# Altium PCB SCC.PcbDoc
Units mm, origin at the board's own origin, x right, y up, seen from the top; angles counter-clockwise.
Board outline 99.06 x 71.12 mm, 4 copper layers (Top Layer, Int1 (GND), Int2 (PWR), Bottom Layer), stack 1.369 mm thick; 7 components, 5 nets, 55 pads, 36 vias.
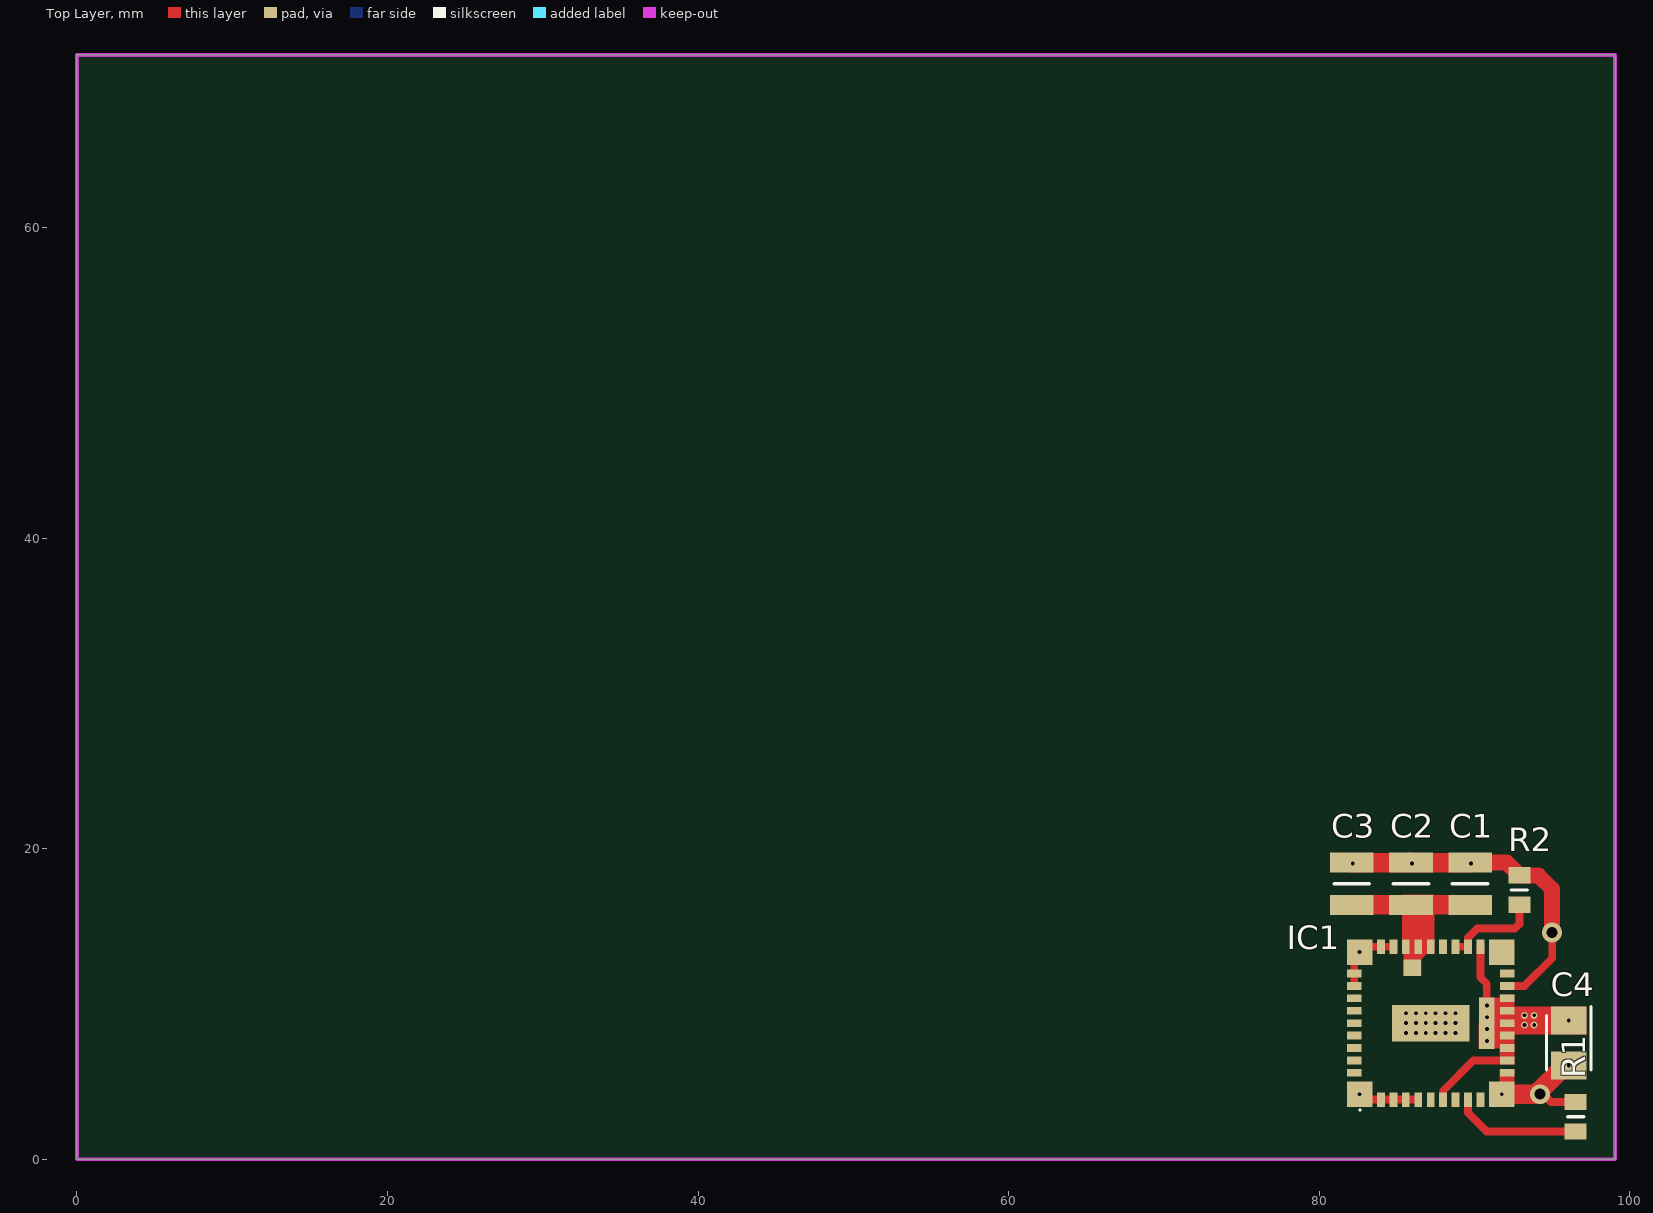
[diagram p0: Top Layer view]
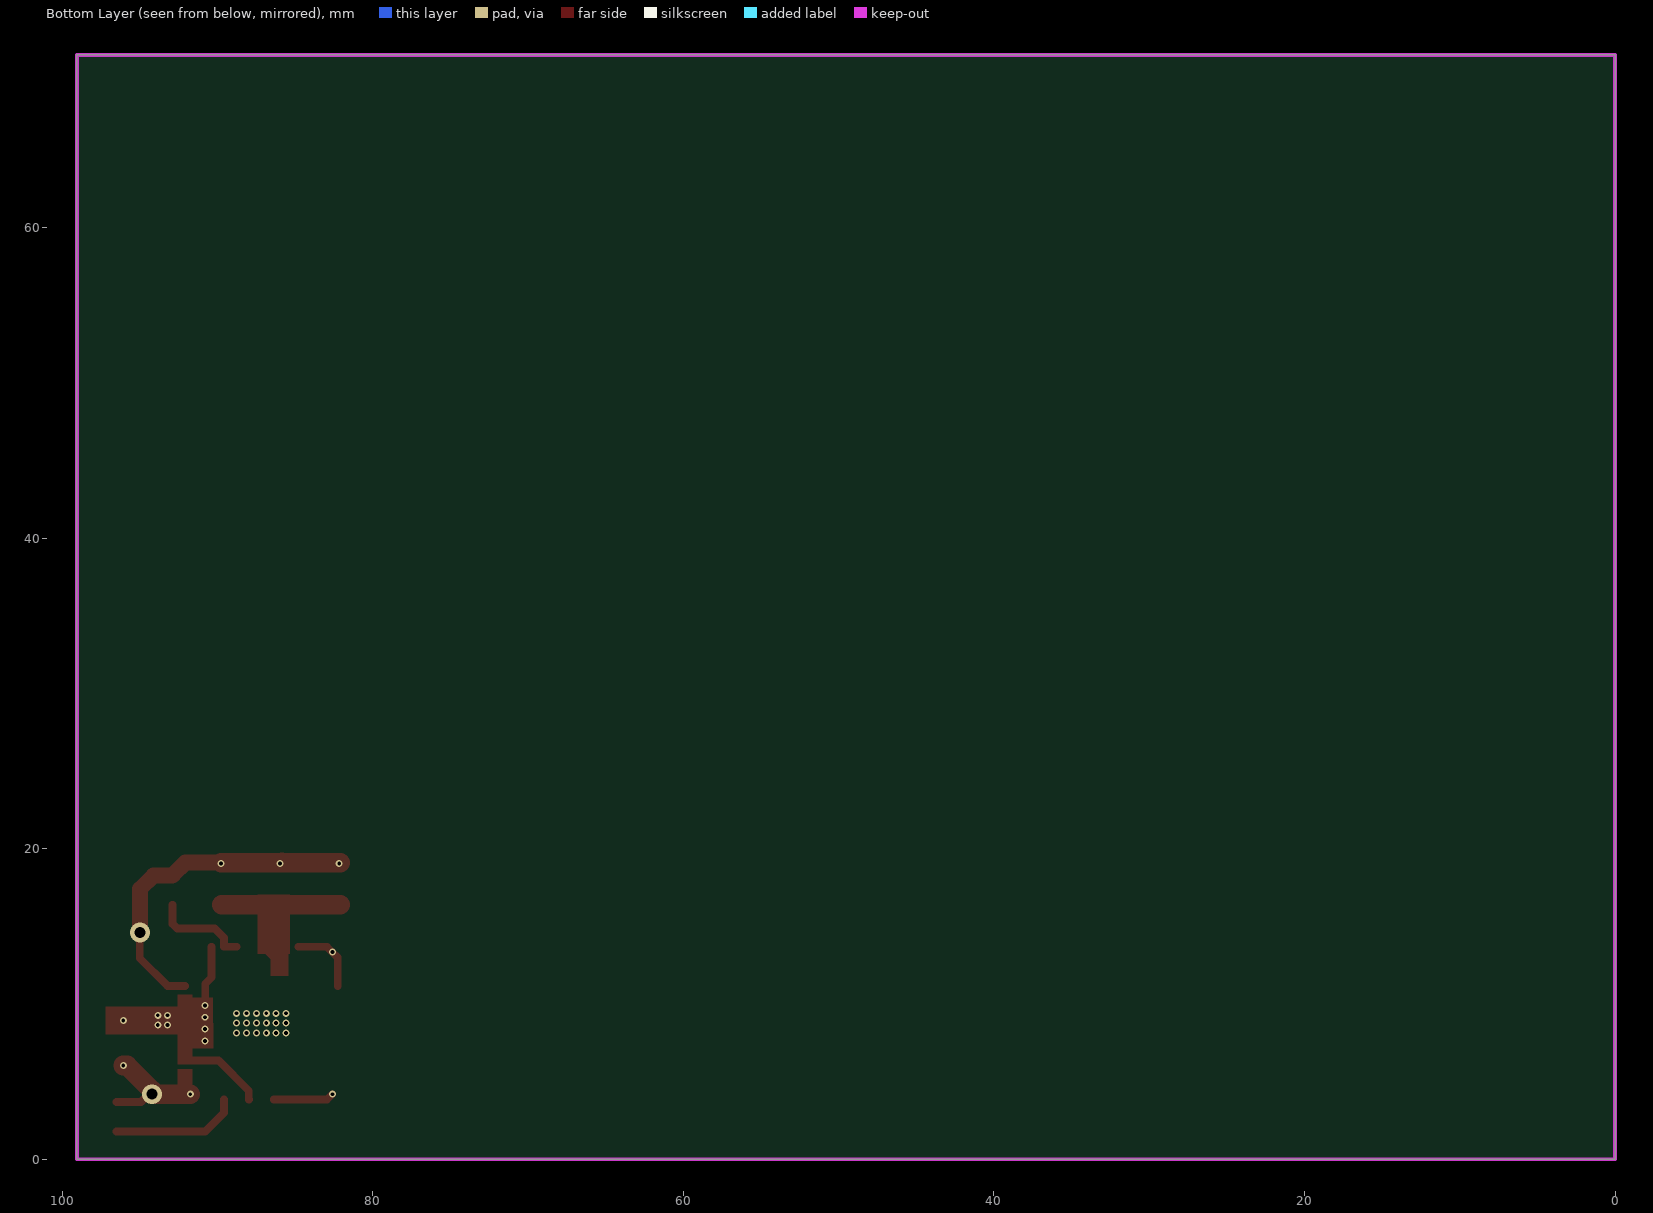
[diagram p1: Bottom Layer view, seen from below]
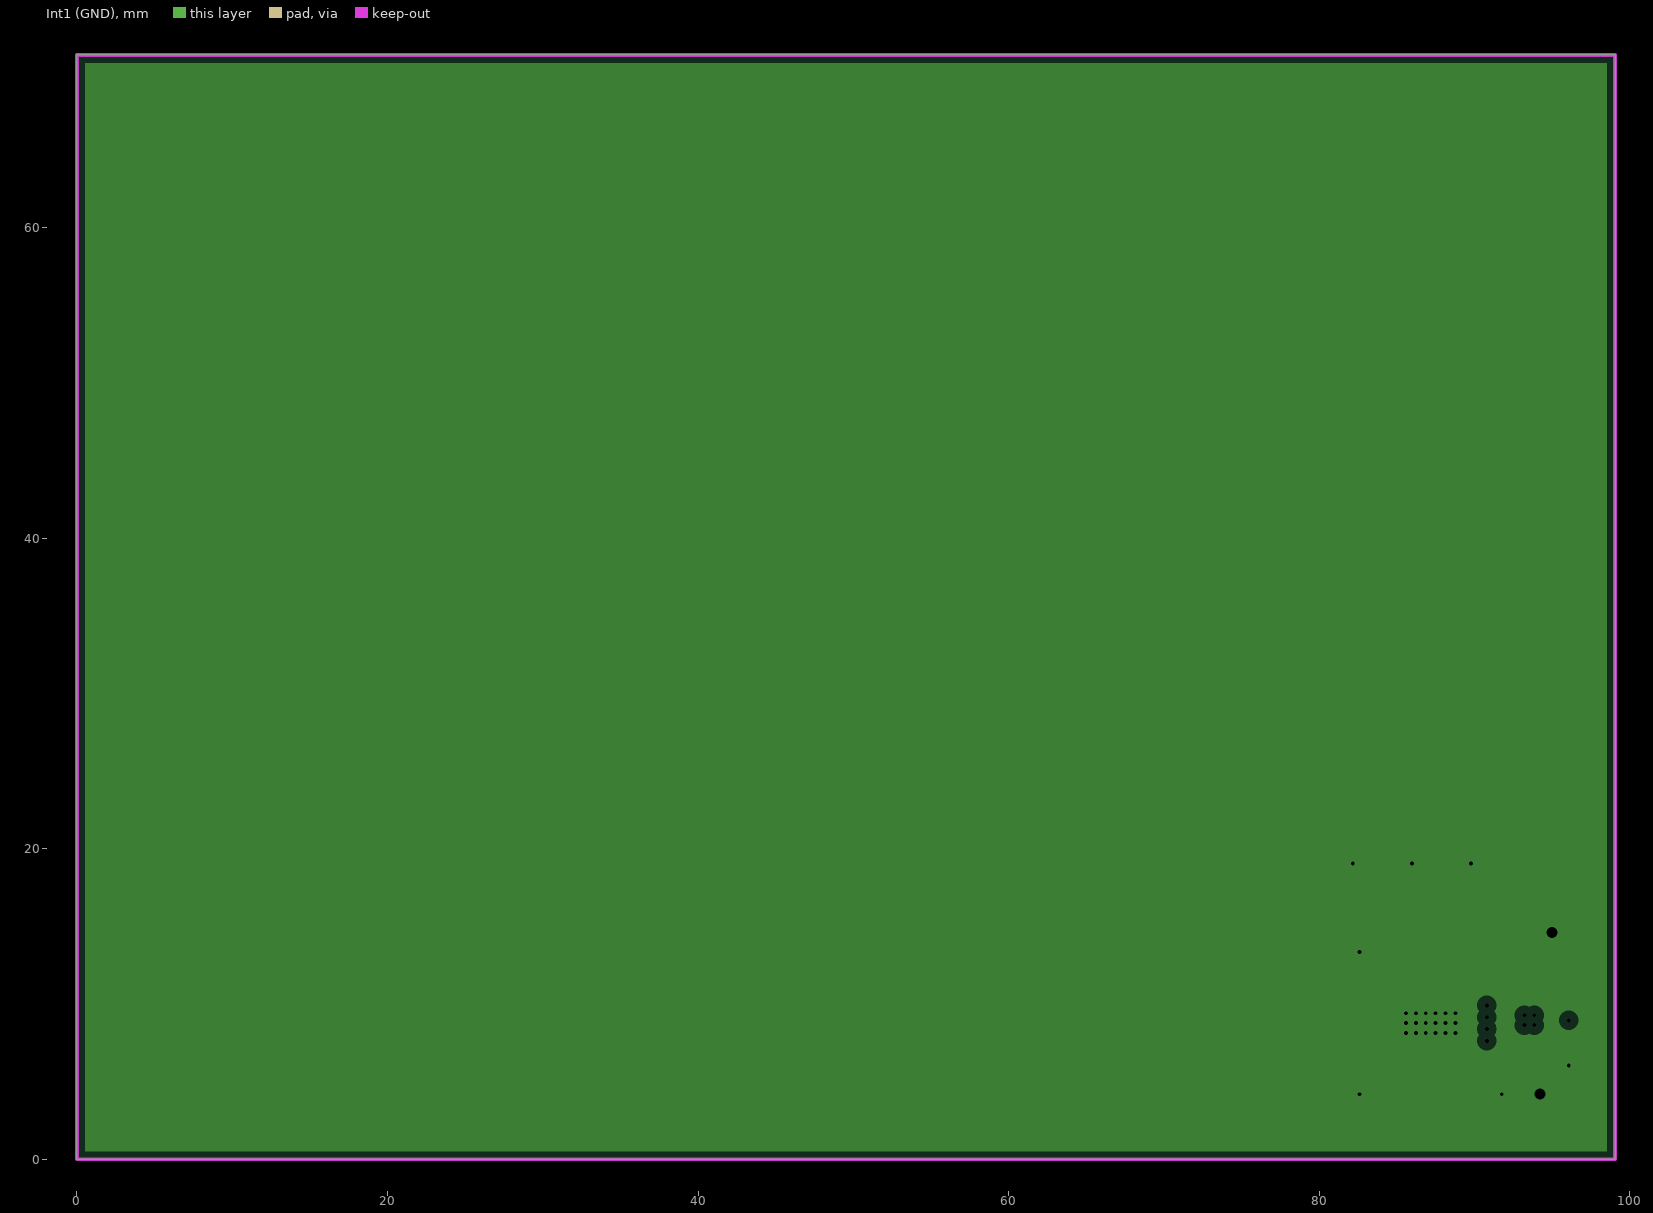
[diagram p2: Int1 (GND), clearances drawn from the general rule]
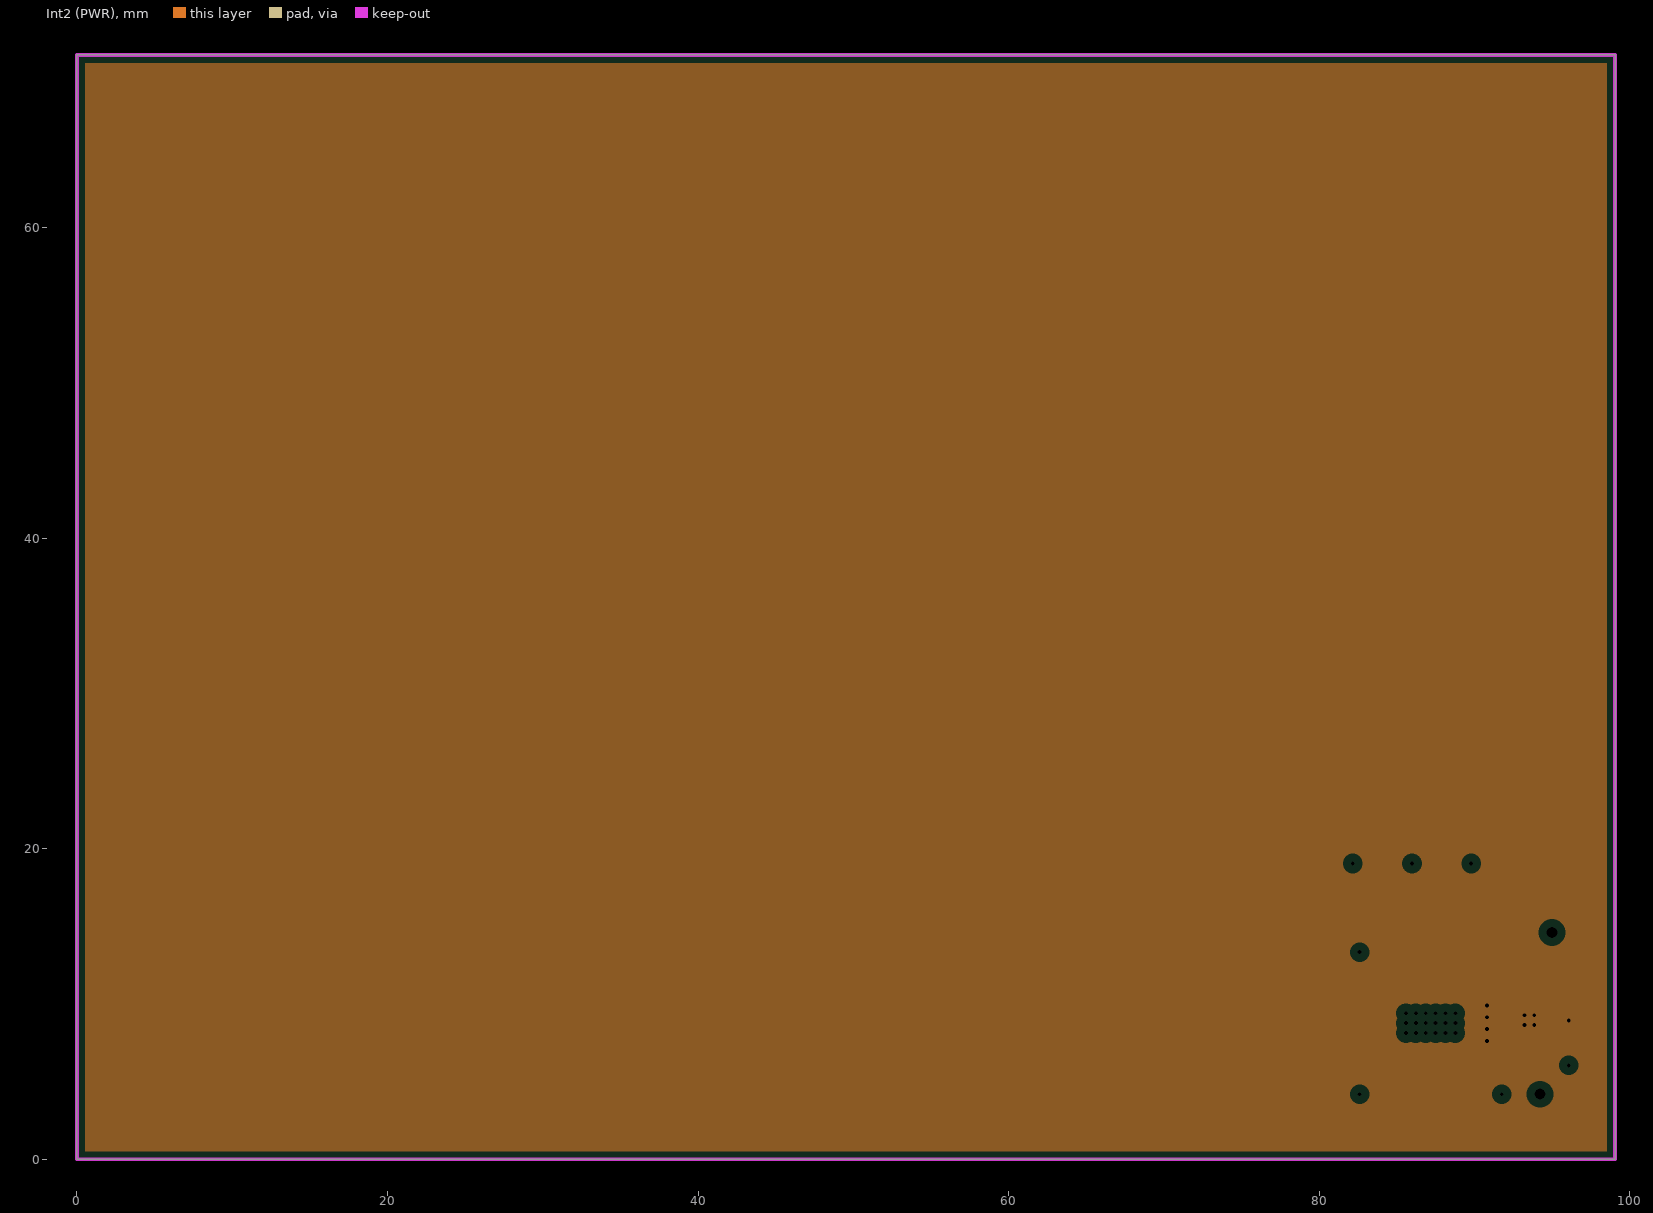
[diagram p3: Int2 (PWR), clearances drawn from the general rule]
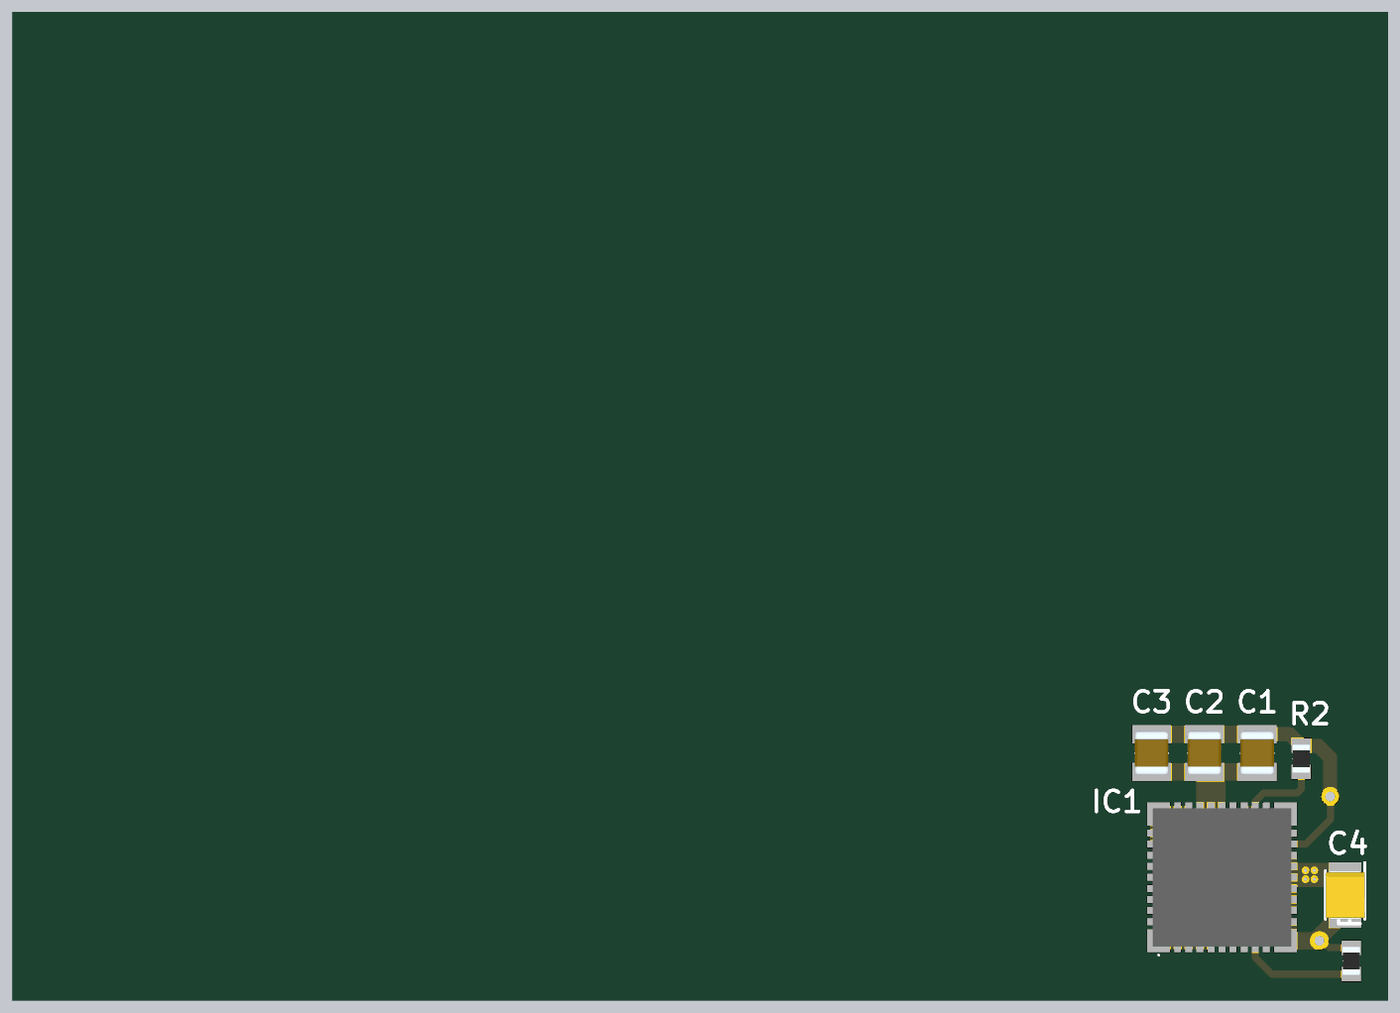
[diagram p4: 3D render of the assembled board from above, using the file's embedded part models]

## Layer stack, top to bottom
Top Solder: solder mask 0.0254, SM-001, Dk 4
Top Layer: signal copper 0.035
Dielectric 1: prepreg 0.1295, PP-017, Dk 4.3
Dielectric 2: prepreg 0.1295, PP-017, Dk 4.3
Int1 (GND): plane copper 0.035, net GND
Dielectric 3: core 0.7112, Core-039, Dk 4.8
Int2 (PWR): plane copper 0.035, net +5
Dielectric 4: prepreg 0.1295, PP-017, Dk 4.3
Dielectric 5: prepreg 0.1295, PP-017, Dk 4.3
Bottom Layer: signal copper 0.035
Bottom Solder: solder mask 0.0254, SM-001, Dk 4

## Board outline
0,0 99.06,0 99.06,71.12 0,71.12

## Design rules (kind name [scope] priority, off if disabled: settings)
BoardOutlineClearance [All] p1: gap=0.2 ignorepadtopadclearanceinfootprint=FALSE except(0.4: Arc-SplitBarrior Arc-SplitContinuation Track-SplitBarrior Track-SplitContinuation SMDPad-SplitBarrior SMDPad-SplitContinuation THPad-SplitBarrior THPad-SplitContinuation Via-SplitBarrior Via-SplitContinuation Fill-SplitBarrior Fill-SplitContinuation Poly-SplitBarrior Poly-SplitContinuation Region-SplitBarrior Region-SplitContinuation Text-SplitBarrior Text-SplitContinuation)
Clearance "Clearance Bottom Layer" [OnLayer('Bottom Layer')] p1: gap=0.203 ignorepadtopadclearanceinfootprint=TRUE except(0.254: Arc-Text Track-Text SMDPad-Text THPad-Text Via-Text Fill-Text Poly-Text Region-Text Text-Text)
Clearance "Clearance Top Layer" [OnLayer('Top Layer')] p2: gap=0.203 ignorepadtopadclearanceinfootprint=TRUE except(0.254: Arc-Text Track-Text SMDPad-Text THPad-Text Via-Text Fill-Text Poly-Text Region-Text Text-Text)
Clearance [All] p3: gap=0.2 ignorepadtopadclearanceinfootprint=FALSE except(0.089: Arc-Arc Arc-Track Arc-SMDPad Track-Track Track-SMDPad SMDPad-SMDPad; 0.127: Arc-Via Track-Via SMDPad-Via THPad-Via Via-Via; 0.254: Arc-Text Track-Text SMDPad-Text THPad-Text Via-Text Fill-Text Poly-Text Region-Text Text-Text)
HoleSize [All] p1: absolutevalues=TRUE maxlimit=6.3 minlimit=0.2 maxpercent=80.000 minpercent=20.000
MinimumAnnularRing [All] p1: minimumring=0.076
MinimumSolderMaskSliver [All] p1: minsoldermaskwidth=0.1
PlaneClearance [All] p1: clearance=0.508
PlaneConnect [All] p1: planeconnectstyle=Direct reliefexpansion=0.508 reliefentries=4 reliefconductorwidth=0.254 reliefairgap=0.254
PolygonConnect PolygonConnect_1 [All] p1: thpad.connectstyle=Relief thpad.reliefconductorwidth=0.508 thpad.reliefentries=4 thpad.polygonreliefangle="90 Angle" thpad.airgapwidth=0.254 smdpad.connectstyle=Relief smdpad.reliefconductorwidth=0.508 smdpad.reliefentries=4 smdpad.polygonreliefangle="90 Angle" smdpad.airgapwidth=0.254 via.connectstyle=Direct via.reliefconductorwidth=0.508 via.reliefentries=4 via.polygonreliefangle="90 Angle" via.airgapwidth=0.254
RoutingCorners [All] p1: cornerstyle=Round minsetback=2.54 maxsetback=2.54
RoutingVias [All] p1: holewidth=0.5 width=1 viastyle="Through Hole" minholewidth=0.2 minwidth=0.45 maxholewidth=1 maxwidth=2
SilkToSilkClearance [All] p1: silktosilkclearance=0.1
SilkToSolderMaskClearance [IsPad] p1: minsilkscreentomaskgap=0.1 clearancetoexposedcopper=TRUE
SolderMaskExpansion [All] p1: expansion=0.05 istentingtop=FALSE
Width [All] p1: maxlimit=2.54 minlimit=0.089 preferedwidth=0.381
23 further rules are at their usual default settings.

## Components (designator, comment, footprint, x,y, rotation, side; value= is the part's Value field where it differs from the comment)
C1 "CL32B106KMVNNWE" CAPC3225X280N 89.728,17.743 r90 top
C2 "CL32B106KMVNNWE" CAPC3225X280N 85.918,17.743 r90 top
C3 "CL32B106KMVNNWE" CAPC3225X280N 82.108,17.743 r90 top
C4 "TCJB106M025R0100" CAPPM3528X210N 96.078,7.493 r270 top
IC1 "LMZ36002RVQT" LMZ36002RVQR 87.188,8.763 r0 top
R1 "ERJ-6ENF4992V" R0805 96.52,2.733 r90 top
R2 "RT0805BRD075K05L" R0805 92.903,17.333 r90 top

## Footprints (in the part's own frame and the unit in brackets; to place one, negate y for a bottom-side part, rotate by r counter-clockwise, add the part's x,y. Pads: shape width x height; smd on the part's side, far side on the other; paste and mask are expansions set on the pad)
CAPC3225X280N [mm]
  rect 1.3x2.82 smd: 1(-1.36,0) 2(1.36,0)
  silkscreen extent 0,-1.15 0,1.15, body extent -1.6,-1.25 1.6,1.25, height 2.8
CAPPM3528X210N [mm]
  rect 1.8x2.3 smd: 1(-1.45,0) 2(1.45,0)
  silkscreen extent -2.35,-1.43 1.75,1.43, body extent -1.75,-1.43 1.75,1.43, height 2.1
LMZ36002RVQR [mm]
  rect 1.65x1.65 smd: 1(-4.575,-4.575) 11(4.575,-4.575) 21(4.575,4.575) 31(-4.575,4.575)
  rect 0.5x0.95 smd: 2(-3.2,-4.925) 3(-2.4,-4.925) 4(-1.6,-4.925) 5(-0.8,-4.925) 6(0,-4.925) 7(0.8,-4.925) 8(1.6,-4.925) 9(2.4,-4.925) 10(3.2,-4.925) 22(3.2,4.925) 23(2.4,4.925) 24(1.6,4.925) 25(0.8,4.925) 26(0,4.925) 27(-0.8,4.925) 28(-1.6,4.925) 29(-2.4,4.925) 30(-3.2,4.925)
  rect 0.95x0.5 smd: 12(4.925,-3.2) 13(4.925,-2.4) 14(4.925,-1.6) 15(4.925,-0.8) 16(4.925,0) 17(4.925,0.8) 18(4.925,1.6) 19(4.925,2.4) 20(4.925,3.2) 32(-4.925,3.2) 33(-4.925,2.4) 34(-4.925,1.6) 35(-4.925,0.8) 36(-4.925,0) 37(-4.925,-0.8) 38(-4.925,-1.6) 39(-4.925,-2.4) 40(-4.925,-3.2)
  rect 5x2.35 smd: 41(0,0)
  rect 1.12x1.05 smd: 42(-1.187,3.575)
  rect 1x3.3 smd: 43(3.6,0)
  silkscreen extent -4.6,-5.65 -4.5,-5.55, body extent -5,-5 5,5, height 2.23
R0805 [mm]
  rect 1.05x1.4 smd: 1(-0.95,0) 2(0.95,0)
  silkscreen extent 0,-0.53 0,0.53, body extent -1,-0.63 1,0.63, height 0.7

## Part data
C1 C2 C3: "Capacitor", Manufacturer_Name="Samsung Electro-Mechanics", Mouser Part Number=N/A, Arrow Part Number=CL32B106KMVNNWE, Arrow Price/Stock=https://www.arrow.com/en/products/cl32b106kmvnnwe/samsung-electro-mechanics, Datasheet Link=https://www.arrow.com/en/products/cl32b106kmvnnwe/samsung-electro-mechanics, Height=2.8mm, Manufacturer_Part_Number=CL32B106KMVNNWE, Mouser Price/Stock=https://www.mouser.co.uk/ProductDetail/Samsung-Electro-Mechanics/CL32B106KMVNNWE?qs=xZ%2FP%252Ba9zWqaEMBbSgKy8gQ%3D%3D
C4: "Capacitor Polarised", Manufacturer_Name=AVX, Mouser Part Number=581-TCJB106M025R, Datasheet Link=http://datasheets.avx.com/TCJ.pdf, Height=2.1mm, Manufacturer_Part_Number=TCJB106M025R0100, Mouser Price/Stock=https://www.mouser.com/Search/Refine.aspx?Keyword=581-TCJB106M025R
IC1: "Integrated Circuit", Manufacturer_Name="Texas Instruments", Mouser Part Number=595-LMZ36002RVQT, Arrow Part Number=LMZ36002RVQT, Arrow Price/Stock=https://www.arrow.com/en/products/lmz36002rvqt/texas-instruments, Datasheet Link=http://www.ti.com/lit/gpn/lmz36002, Height=2.13mm, Manufacturer_Part_Number=LMZ36002RVQT, Mouser Price/Stock=https://www.mouser.co.uk/ProductDetail/Texas-Instruments/LMZ36002RVQT?qs=kFLL9AfgRSBjXTxBMSjGOw%3D%3D
R1: "Resistor", Manufacturer_Name=Panasonic, Mouser Part Number=667-ERJ-6ENF4992V, Datasheet Link=https://industrial.panasonic.com/cdbs/www-data/pdf/RDA0000/AOA0000C84.pdf, Height=0.7mm, Manufacturer_Part_Number=ERJ-6ENF4992V, Mouser Price/Stock=https://www.mouser.com/Search/Refine.aspx?Keyword=667-ERJ-6ENF4992V
R2: "Resistor", Manufacturer_Name=Yageo, Mouser Part Number=603-RT0805BRD075K05L, Datasheet Link=https://www.mouser.at/datasheet/2/447/PYu-RT_1-to-0.01_RoHS_L_11-1669912.pdf, Height=0.7mm, Manufacturer_Part_Number=RT0805BRD075K05L, Mouser Price/Stock=https://www.mouser.at/ProductDetail/Yageo/RT0805BRD075K05L?qs=bQfrgN9vNvwObDVrZ%2FDM5w%3D%3D

## Via types
v1: diameter 0.45, hole 0.25, Top Layer to Bottom Layer, 34 vias
v2: diameter 1.27, hole 0.711, Top Layer to Bottom Layer, 2 vias

## Nets (pads, with @x,y where several pads share a name; then routed paths per layer and width w, separated by ;. In a path a pad name is that pad's centre, name@x,y a point inside that pad or via, vN(x,y) a via of type N, cw(c..) or ccw(c..) an arc to the next point about the centre after c; other vN are vias at no path point)
+5: C4.1 IC1.7 IC1.13 IC1.14 IC1.15 IC1.16 IC1.17 IC1.18 IC1.22 IC1.43 | length 10.6
  Top Layer w0.5: IC1.7 87.992,3.842 87.992,4.414 89.941,6.363 IC1.13 ; IC1.22 90.388,11.72 90.805,11.303 90.805,8.78 IC1.43
  other v1: 90.805,7.62 90.805,8.382 93.218,8.636 93.853,8.636 96.078,8.943 90.805,9.144 93.218,9.271 93.853,9.271 90.805,9.906
GND: C1.2 C2.2 C3.2 C4.2 IC1.1 IC1.2 IC1.3 IC1.4 IC1.5 IC1.11 IC1.12 IC1.19 IC1.29 IC1.30 IC1.31 IC1.32 IC1.33 IC1.41 R1.2 R2.2 | length 38.2
  Top Layer w0.5: IC1.33 IC1.32 82.263,12.988 v1(82.613,13.338) 82.963,13.688 IC1.30 IC1.29 ; v1(82.613,4.188) 82.963,3.838 IC1.2 IC1.3 IC1.4 IC1.5 ; v1(91.763,4.188) IC1.11@91.948,4.003 ; IC1.19 93.23,11.163 95.021,12.954 95.021,14.58 v2(94.996,14.605) ; v2(94.223,4.188) 94.431,4.188 94.936,3.683 R1.2
  Top Layer w0.508: IC1.19 IC1.19@92.117,11.167
  Top Layer w1.016: C1.2@89.774,19.103 92.083,19.103 R2.2@92.849,18.337 ; R2.2 92.92,18.266 94.129,18.266 94.996,17.399 v2(94.996,14.605)
  Top Layer w1.27: C3.2 C2.2@85.867,19.103 ; C2.2@85.852,19.118 C2.2@85.867,19.103 ; C1.2@89.774,19.103 C1.2 C2.2 C2.2@85.867,19.103 ; v1(91.763,4.188) v2(94.223,4.188) 94.223,4.438 95.828,6.043 v1(96.078,6.043)
  other v1: 85.598,8.128 86.233,8.128 86.868,8.128 87.503,8.128 88.138,8.128 88.773,8.128 85.598,8.763 86.233,8.763 86.868,8.763 87.503,8.763 88.138,8.763 88.773,8.763 85.598,9.398 86.233,9.398 86.868,9.398 87.503,9.398 88.138,9.398 88.773,9.398 82.169,19.05 85.979,19.05 89.789,19.05
NetIC1_9: IC1.9 R1.1 | length 8.3
  Top Layer w0.508: IC1.9 89.592,3.834 89.592,2.991 90.8,1.783 R1.1
NetIC1_23: IC1.23 IC1.24 R2.1 | length 6.3
  Top Layer w0.5: IC1.24 IC1.23 89.592,13.692 89.592,14.264 90.187,14.859 92.605,14.859 92.903,15.157 R2.1
VCC: C1.1 C2.1 C3.1 IC1.26 IC1.27 IC1.28 IC1.42 | length 10.8
  Top Layer w0.508: IC1.28 IC1.27 ; IC1.42 86.036,12.338 86.307,12.609 86.307,13.39 86.388,13.471 IC1.27 ; IC1.26 IC1.27
  Top Layer w1.27: C3.1 C2.1 C1.1
pads on no net: IC1.6 IC1.8 IC1.10 IC1.20 IC1.21 IC1.25 IC1.34 IC1.35 IC1.36 IC1.37 IC1.38 IC1.39 IC1.40

## Polygon pours and split planes (outlines as drawn)
GND on Int1 (GND) (split plane): 98.55,0.51 0.51,0.51 0.51,70.61 98.55,70.61
+5 on Int2 (PWR) (split plane): 98.55,0.51 0.51,0.51 0.51,70.61 98.55,70.61

## Keep-outs
Keep-Out Layer:
  the board outline again, w0.254

## Other copper
Top Layer:
  region net GND: 91.643,5.791 92.583,5.791 92.583,4.801 91.643,4.801
  region net +5: 92.583,10.592 92.583,9.83 97.206,9.83 97.206,8.052 92.583,8.052 92.583,6.121 92.329,6.121 92.202,6.121 92.126,6.121 92.05,6.121 91.745,6.121 91.643,6.121 91.643,7.137 90.297,7.137 90.301,10.397 91.65,10.397 91.643,10.592
  region net VCC: 85.446,11.811 85.446,13.233 85.344,13.233 85.344,17.018 87.427,17.018 87.427,13.233 86.919,13.233 86.563,12.878 86.563,11.811

## Silkscreen, mask and mechanical layers (free items; w line width, h text height)
Board:
  the board outline again, w0.254